# Altium PCB mini_backplane.PcbDoc (part 5 of 5)
Units mm, origin at the board's own origin, x right, y up, seen from the top; angles counter-clockwise.
Board outline 232.03 x 195 mm, 5 copper layers (Top Layer, MidLayer1, GND, POWER, Bottom Layer); 241 components, 200 nets, 1637 pads, 676 vias.
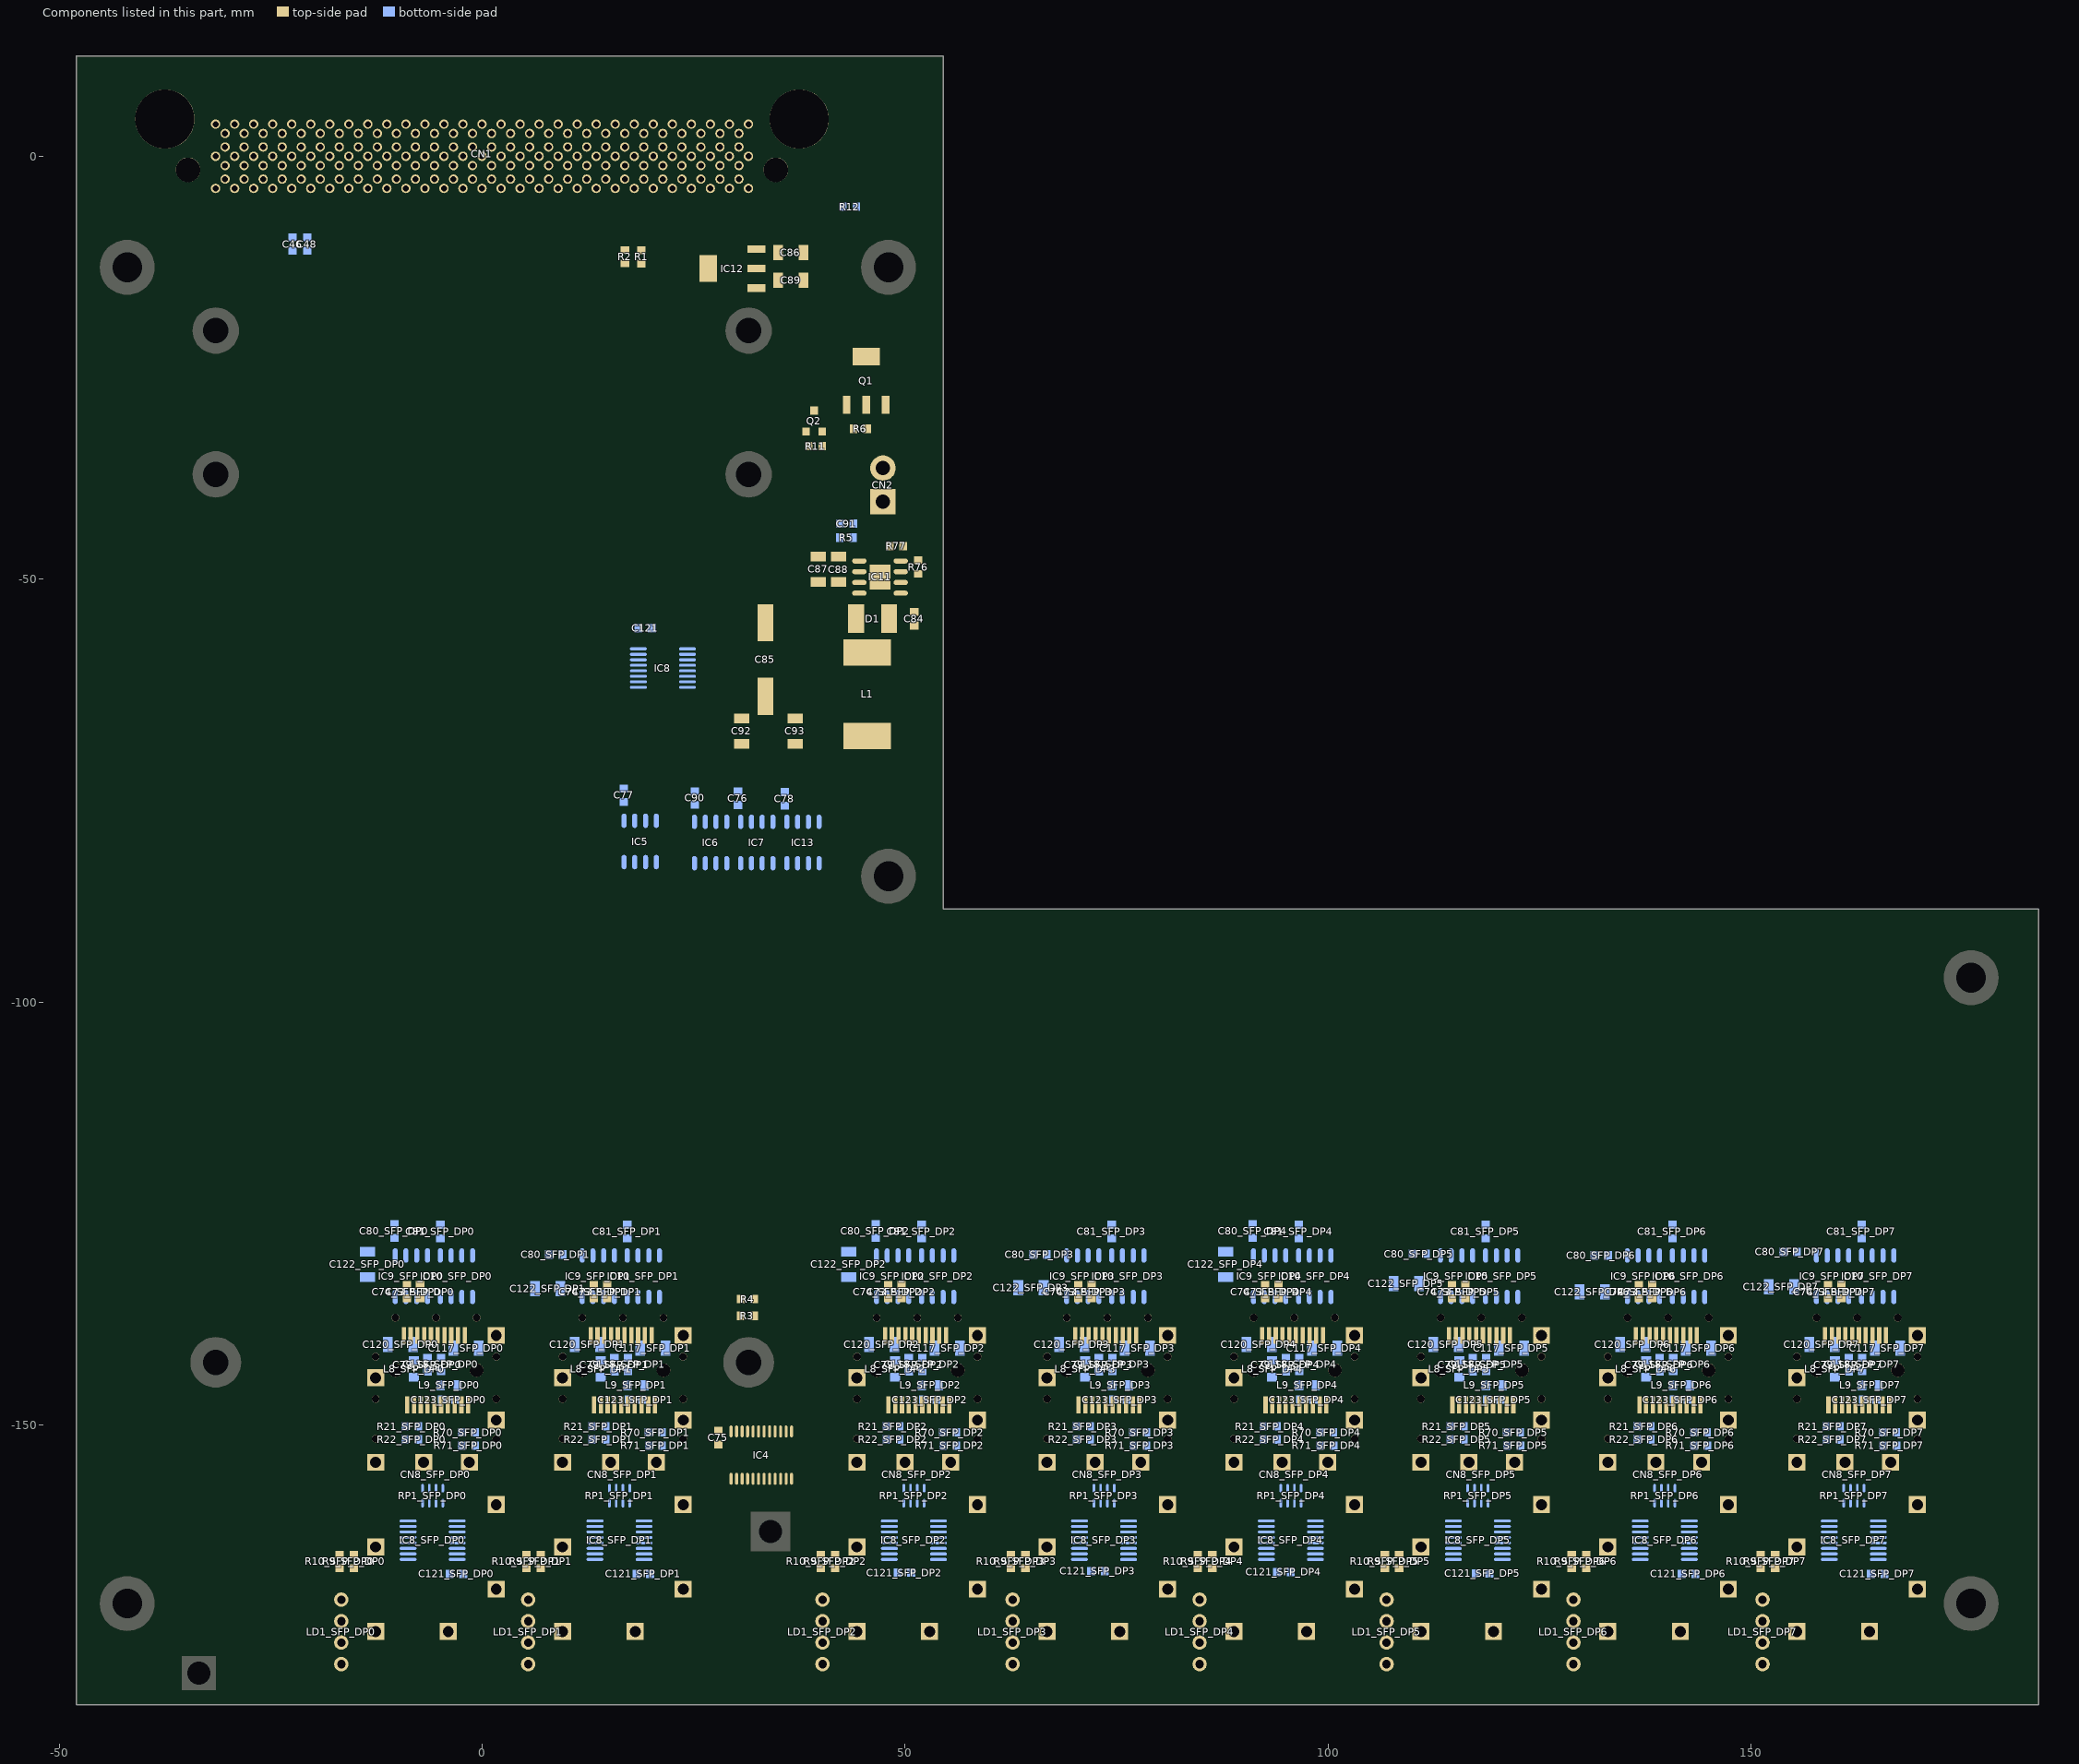
[diagram p7: the components of this part, seen from the top]

## Polygon pours and split planes (outlines as drawn) (continued)
+3V3 on POWER (split plane): -13.516,3.005 -13.516,0.848 -13.506,0.799 -13.478,0.757 -12.716,-0.005 -12.674,-0.033 -12.624,-0.043 -11.862,-0.043 -11.813,-0.033 -11.771,-0.005 -10.856,0.909 -10.828,0.951 -10.818,1.001 -10.818,2.979 -10.056,3.742 -3.127,3.742 -2.39,3.005 -2.39,0.544 -2.381,0.494 -2.353,0.452 -1.667,-0.234 -1.625,-0.262 -1.575,-0.272 28.877,-0.272 34.821,-6.216 34.821,-8.852 30.657,-8.852 30.608,-8.862 30.566,-8.89 28.839,-10.617 28.811,-10.659 28.801,-10.709 28.801,-17.081 24.724,-21.158 24.696,-21.2 24.686,-21.25 24.686,-25.212 24.696,-25.262 24.724,-25.304 27.492,-28.072 27.534,-28.1 27.584,-28.11 31.544,-28.11 35.419,-31.985 35.419,-50.133 35.428,-50.183 35.456,-50.225 38.456,-53.225 38.498,-53.253 38.548,-53.263 53.998,-53.263 53.998,-88.991 54.007,-89.091 54.036,-89.187 54.084,-89.275 54.147,-89.352 54.224,-89.416 54.313,-89.463 54.408,-89.492 54.508,-89.502 183.538,-89.502 183.538,-182.613 -47.471,-182.613 -47.471,-6.114 -32.944,-6.114 -32.895,-6.104 -32.853,-6.076 -26.922,-0.145 -19.279,-0.145 -19.229,-0.135 -19.187,-0.107 -18.121,0.96 -18.093,1.002 -18.083,1.052 -18.083,3.309 -17.574,3.818 -14.329,3.818
+12V_MCH on POWER (split plane): 53.998,-26.175 38.61,-26.175 35.079,-22.644 35.079,-6.162 35.07,-6.112 35.042,-6.07 29.022,-0.051 28.98,-0.023 28.93,-0.013 -1.522,-0.013 -2.132,0.597 -2.132,3.058 -2.141,3.108 -2.169,3.15 -2.982,3.963 -3.024,3.991 -3.074,4 -10.11,4 -10.159,3.991 -10.201,3.963 -11.039,3.124 -11.067,3.082 -11.077,3.033 -11.077,1.054 -11.916,0.216 -12.571,0.216 -13.257,0.902 -13.257,3.058 -13.267,3.108 -13.295,3.15 -14.184,4.039 -14.226,4.067 -14.275,4.077 -17.628,4.077 -17.678,4.067 -17.72,4.039 -18.304,3.455 -18.332,3.413 -18.342,3.363 -18.342,1.105 -19.333,0.114 -26.975,0.114 -27.025,0.104 -27.067,0.076 -32.998,-5.855 -47.471,-5.855 -47.471,11.362 53.998,11.362
+12V_PSU on POWER (split plane): 34.821,-22.697 34.83,-22.747 34.858,-22.789 38.465,-26.396 38.507,-26.424 38.557,-26.434 53.998,-26.434 53.998,-53.004 38.602,-53.004 35.677,-50.08 35.677,-31.931 35.668,-31.882 35.64,-31.84 31.689,-27.889 31.647,-27.861 31.597,-27.851 27.638,-27.851 24.945,-25.158 24.945,-21.303 29.022,-17.226 29.05,-17.184 29.06,-17.135 29.06,-10.762 30.711,-9.111 34.821,-9.111
+3V3 on POWER (split plane): 181.919,-159.004 179.177,-159.004 179.177,-156.263 181.919,-156.263

## Other copper
Top Layer:
  text "1" at 181.348,-163.833 h1.52 r90
Bottom Layer:
  text "4" at 181.348,-154.833 h1.52 r90
GND (plane layer: these items are gaps in the copper):
  lines w0.254: 27.406,-71.262 27.406,-44.973 30.505,-41.874 38.684,-41.874 46.075,-34.483 54.737,-34.483 ; 38.887,-72.812 39.09,-73.015 54.686,-73.015 ; 179.048,-162.133 182.048,-162.133 ; 179.048,-162.133 179.048,-159.133 182.048,-159.133 182.048,-162.133 ; 179.048,-162.133 182.048,-162.133
  text "2" at 181.348,-160.833 h1.52 r90
POWER (plane layer: these items are gaps in the copper):
  lines w0.254: -47.854,-5.984 -32.944,-5.984 -26.975,-0.015 -19.279,-0.015 -18.212,1.052 -18.212,3.363 -17.628,3.947 -14.275,3.947 -13.386,3.058 -13.386,0.848 -12.624,0.086 -11.862,0.086 -10.948,1.001 -10.948,3.033 -10.11,3.871 -3.074,3.871 -2.261,3.058 -2.261,0.544 -1.575,-0.142 28.93,-0.142 34.95,-6.162 34.95,-22.697 38.557,-26.304 54.584,-26.304 ; 34.899,-8.981 30.657,-8.981 28.93,-10.709 28.93,-17.135 24.815,-21.25 24.815,-25.212 27.584,-27.981 31.597,-27.981 35.548,-31.931 35.548,-50.133 38.548,-53.133 54.548,-53.133 ; 179.048,-159.133 182.048,-159.133 ; 179.048,-159.133 179.048,-156.133 182.048,-156.133 182.048,-159.133 ; 179.048,-159.133 182.048,-159.133 ; 179.048,-159.133 182.048,-159.133
  text "3" at 181.348,-157.833 h1.52 r90

## Silkscreen, mask and mechanical layers (free items; w line width, h text height)
Top Overlay:
  drawing of 475 lines, arcs and shapes, not listed
  text "WhiteRabbit" at 112.046,-97.713 h4.32
  text "Switch MCH Mini-Backplane" at 99.39,-100.548 h4.32
  text "T. W. 2010" at 114.262,-103.321 h3.81
  text "rev 1.0" at 116.509,-106.162 h3.81
Mechanical 1:
  lines w0.254: -87.5,-337.5 215.5,-337.5 215.5,-274.5 -87.5,-274.5 -87.5,-337.5
  lines w0.3: -47.981,-183.124 -47.981,11.847 -47.956,11.872 -47.651,11.872 54.508,11.872 54.508,-88.991 184.048,-88.991 184.048,-183.124 -47.981,-183.124
Mechanical 2:
  drawing of 486 lines, arcs and shapes, not listed
  text "125M" at -6.4,-280.4 h3
  text "PPS" at 1.8,-280.4 h3
  text "PPS" at 9.4,-280.4 h3
  text "125M" at 16.6,-280.4 h3
  text "10M" at 24.4,-280.4 h3
  text "RS-232" at -24.8,-281.6 h4
  text "Out" at -5.6,-282.8 h3
  text "Out" at 2.2,-282.8 h3
  text "In" at 10.8,-282.8 h3
  text "In" at 18.8,-282.8 h3
  text "In" at 26,-283 h3
  text "WhiteRabbit" at 155.2,-285.8 h7
  text "CERN" at -75.479,-289.733 h2.16
  text "Switch" at 170.2,-291.8 h7
  text "Ethernet" at -26.8,-296.2 h4
  text "2U8D" at 174.2,-297.8 h7
  text "UP 0" at -1.8,-310.4 h4
  text "UP 1" at 15.2,-310.4 h4
  text "Link" at -26.4,-320.4 h4
  text "Activity" at -31.6,-324.4 h4
  text "DP 0" at -9.4,-331.157 h4
  text "DP 2" at 47.8,-331.157 h4
  text "DP 4" at 92.2,-331.157 h4
  text "DP 6" at 136.6,-331.157 h4
  text "DP 1" at 12.8,-331.2 h4
  text "DP 3" at 70,-331.2 h4
  text "DP 5" at 114.4,-331.2 h4
  text "DP 7" at 158.8,-331.2 h4
Mechanical 3:
  circle w0.1: c-3.293,-287.546 r3.5
  circle w0.1: c4.307,-287.546 r3.5
  circle w0.1: c11.907,-287.546 r3.5
  circle w0.1: c19.507,-287.546 r3.5
  circle w0.1: c27.107,-287.546 r3.5
  circle w0.254: c-16.6,-319.4 r1.25
  circle w0.254: c-16.6,-323.4 r1.25
  circle w0.254: c5.5,-323.4 r1.25
  circle w0.254: c5.5,-319.4 r1.25
  circle w0.254: c40.3,-323.4 r1.25
  circle w0.254: c40.3,-319.4 r1.25
  circle w0.254: c62.8,-323.4 r1.25
  circle w0.254: c62.8,-319.4 r1.25
  circle w0.254: c84.9,-323.4 r1.25
  circle w0.254: c84.9,-319.4 r1.25
  circle w0.254: c107,-323.4 r1.25
  circle w0.254: c107,-319.4 r1.25
  circle w0.254: c129,-323.4 r1.25
  circle w0.254: c129,-319.4 r1.25
  circle w0.254: c151.4,-323.4 r1.25
  circle w0.254: c151.4,-319.4 r1.25
  lines w0.1: -29.301,-311.381 -29.301,-298.381 -11.801,-298.381 -11.801,-311.381 -29.301,-311.381 ; -28.593,-291.181 -28.593,-283.281 -8.993,-283.281 -8.993,-291.181 -28.593,-291.181 ; -3.193,-306.746 -3.193,-304.746 29.407,-304.746 30.407,-304.746 30.407,-306.746 -3.193,-306.746
  lines w0.152: -13.401,-326.081 2.499,-326.081 2.499,-315.446 -13.401,-315.446 -13.401,-326.081 ; -6.401,-303.281 -6.401,-292.646 9.499,-292.646 9.499,-303.281 -6.401,-303.281 ; 8.699,-326.081 8.699,-315.446 24.599,-315.446 24.599,-326.081 8.699,-326.081 ; 11.099,-303.281 11.099,-292.646 26.899,-292.646 26.899,-303.281 11.099,-303.281 ; 43.499,-326.081 43.499,-315.446 59.399,-315.446 59.399,-326.081 43.499,-326.081 ; 65.999,-326.081 65.999,-315.446 81.899,-315.446 81.899,-326.081 65.999,-326.081 ; 88.099,-326.081 88.099,-315.446 103.999,-315.446 103.999,-326.081 88.099,-326.081 ; 110.199,-326.081 110.199,-315.446 126.099,-315.446 126.099,-326.081 110.199,-326.081 ; 132.199,-326.081 132.199,-315.446 148.099,-315.446 148.099,-326.081 132.199,-326.081 ; 154.599,-326.081 154.599,-315.446 170.499,-315.446 170.499,-326.081 154.599,-326.081
  lines w0.254: -87.5,-337.5 215.5,-337.5 215.5,-274.5 -87.5,-274.5 -87.5,-337.5
Mechanical 4:
  drawing of 548 lines, arcs and shapes, not listed
  text "SMB Connectors" at 0,-277 h2.16
  text "PPS" at 1.894,-281.235 h2.16
  text "PPS" at 9.387,-281.235 h2.16
  text "125M" at 16.499,-281.235 h2.16
  text "10M" at 25.135,-281.235 h2.16
  text "125M" at -6.7,-281.3 h2.16
  text "OUT" at -5.599,-284.029 h2.16
  text "OUT" at 1.767,-284.029 h2.16
  text "IN" at 10.911,-284.029 h2.16
  text "IN" at 19.039,-284.029 h2.16
  text "IN" at 26.532,-284.029 h2.16
  text "RS232" at -23.7,-288.2 h2.16
  text "MCH_CLKB PCB (1.6mm thickness)" at 39.9,-292.8 h2.16
  text "Uplink 0" at 14.1,-298.5 h2.16
  text "Uplink 1" at -3.2,-299 h2.16
  text "MGMT" at -24.2,-301.2 h2.16
  text "Ethernet" at -24.1,-304.5 h2.16
  text "LEDs line" at 5.3,-306.1 h2.16
  text "MCH_MAIN PCB (1.6mm thickness)" at 40.3,-308.4 h2.16
  text "Mini-Backplane PCB (1.6mm thickness)" at 46,-324 h2.16
Mechanical 11:
  circle w0.254: c176.05,-171.1 r1.75
  circle w0.254: c176.05,-97.15 r1.75
  circle w0.254: c48.05,-85.1 r1.75
  circle w0.254: c48.05,-13.15 r1.75
  circle w0.254: c-42,-13.15 r1.75
  circle w0.254: c-42,-171.1 r1.75
  circle w0.254: c64.1,-176.5 r1.9
  lines w0.254: -48,-183.1 -48,-180.25 ; -46.3,-171.1 -37.3,-171.1 ; -46.3,-13.15 -37.3,-13.15 ; -42,-175.35 -42,-166.45 ; -42,-17.4 -42,-8.5 ; 43.75,-85.1 52.75,-85.1 ; 43.75,-13.15 52.75,-13.15 ; 48.05,-89.35 48.05,-80.45 ; 48.05,-17.4 48.05,-8.5 ; 61.7,-176.5 64.2,-176.5 66.7,-176.5 64.1,-176.5 ; 64.1,-178.9 64.1,-174 ; 171.75,-171.1 180.75,-171.1 ; 171.75,-97.15 180.75,-97.15 ; 176.05,-175.35 176.05,-166.45 ; 176.05,-101.4 176.05,-92.5
  lines w0.3: -47.981,-183.124 -47.981,11.847 -47.956,11.872 -47.651,11.872 54.508,11.872 54.508,-88.991 184.048,-88.991 184.048,-183.124 -47.981,-183.124
  text "Case reference point (front panel support hole, fi=3.8mm)" at 38.45,-172.6 h2
Mechanical 13:
  lines w0.254: -48,-193.4 -47.953,-330.155 ; -24.2,-187.4 176,-187.4 ; -0.001,-315.781 -0.001,-269.981 ; 0,-270 0,0 ; 184,-327.6 184,-193.4
Mechanical 15:
  lines w0.008: -35.633,-183.21 -29.044,-183.21 -29.044,-171.501 -11.944,-171.501 -11.944,-183.215 31.566,-183.215
  lines w0.01: -36.734,-160.612 -36.734,-16.512 ; -36.734,-16.562 cw(c-36.234,-16.562) -36.234,-16.062 ; -36.284,-16.062 -33.484,-16.062 ccw(c-33.484,-15.062) -32.484,-15.062 -32.484,-11.883 ; -35.634,-183.212 -35.634,-168.862 ; -32.484,-12.162 -32.484,-3.112 cw(c-31.984,-3.112) -31.984,-2.612 32.016,-2.612 cw(c32.016,-3.112) 32.516,-3.112 32.516,-12.162 32.516,-15.046 ; 0.016,-7.112 0.016,-3.112 ; 0.016,-3.312 0.016,-2.612 ; 31.566,-183.212 31.566,-177.212 35.766,-177.212 ; 32.516,-15.015 ccw(c33.539,-15.04) 33.54,-16.062 36.266,-16.062 cw(c36.266,-16.562) 36.766,-16.562 36.766,-169.612
  lines w0.2: -31.979,-178.78 180.238,-178.78 ; 153.314,-132.425 172.11,-132.425
Drill Drawing:
  lines w0.254: -75,-240 50,-240 ; -75,-235 50,-235 ; -75,-230 50,-230 ; -75,-220 50,-220 ; -42,-240 -42,-215 ; 50,-225 -75,-225 -75,-215 ; 64.1,-274.6 64.1,-273.2 ; -75,-215 50,-215 50,-260 -75,-260 -75,-215
  text "LAYER" at -73,-219 h3
  text "DESCRIPTION" at -40,-219 h3
  text "Mechanical 1" at -73,-224 h3
  text "Board / front panel outline" at -40,-224 h3
  text "Mechanical 2" at -73,-229 h3
  text "Front panel graphics" at -40,-229 h3
  text "Mechanical 3" at -73,-234 h3
  text "Front panel milling" at -40,-234 h3
  text "Mechanical 4" at -73,-239 h3
  text "Front panel assembly" at -40,-239 h3
  text "All front panel holes milled inside the edges" at -73,-252 h3
  text "Holes diameter 7mm" at 30.7,-285.4 h1.5

## Dimensions
-47.952,-185.133 to 184.048,-184.133 on Mechanical 1
54.548,13.367 to -47.952,12.867 on Mechanical 1
-48.952,11.867 to -49.452,-183.133 on Mechanical 1
55.048,11.867 to 59.548,-88.633 on Mechanical 1
-8.965,-283.26 to -28.565,-283.26 on Drill Drawing
-36.773,-291.16 to -28.565,-283.26 on Drill Drawing
29.435,-304.725 to 30.435,-306.725 on Drill Drawing
-3.197,-304.968 to 30.435,-306.725 on Drill Drawing
-11.773,-314.66 to -3.173,-304.66 on Drill Drawing
-29.301,-311.381 to -11.801,-311.381 on Drill Drawing
-36.773,-291.16 to -37.273,-292.76 on Drill Drawing
-37.273,-306.76 to -37.273,-308.36 on Drill Drawing
-37.173,-306.759 to -36.773,-292.76 on Drill Drawing
-36.801,-308.381 to -39.5,-325.9 on Drill Drawing
-39.2,-337.601 to -39.1,-327.601 on Drill Drawing
-87.5,-274.5 to -87.5,-337.5 on Drill Drawing
-87.5,-337.5 to 215.5,-337.5 on Drill Drawing
154.599,-315.446 to 170.499,-315.446 on Drill Drawing
170.499,-315.446 to 170.499,-326.081 on Drill Drawing

## Text inside footprints (layer, text, board x,y; h text height)
CN1: Top Overlay "Front side" at -7.493,-6.772 h1.52; Mechanical 15 "Card edge" at -8.1,-1.5 h1.52